# Altium PCB PCB1.PcbDoc
Units mil, origin at the board's own origin, x right, y up, seen from the top; angles counter-clockwise.
Board outline 8700 x 4700 mil, 2 copper layers (Top Layer, Bottom Layer); 42 components, 37 nets, 169 pads, 0 vias.
Unrouted connection lines stored in the file: 4.
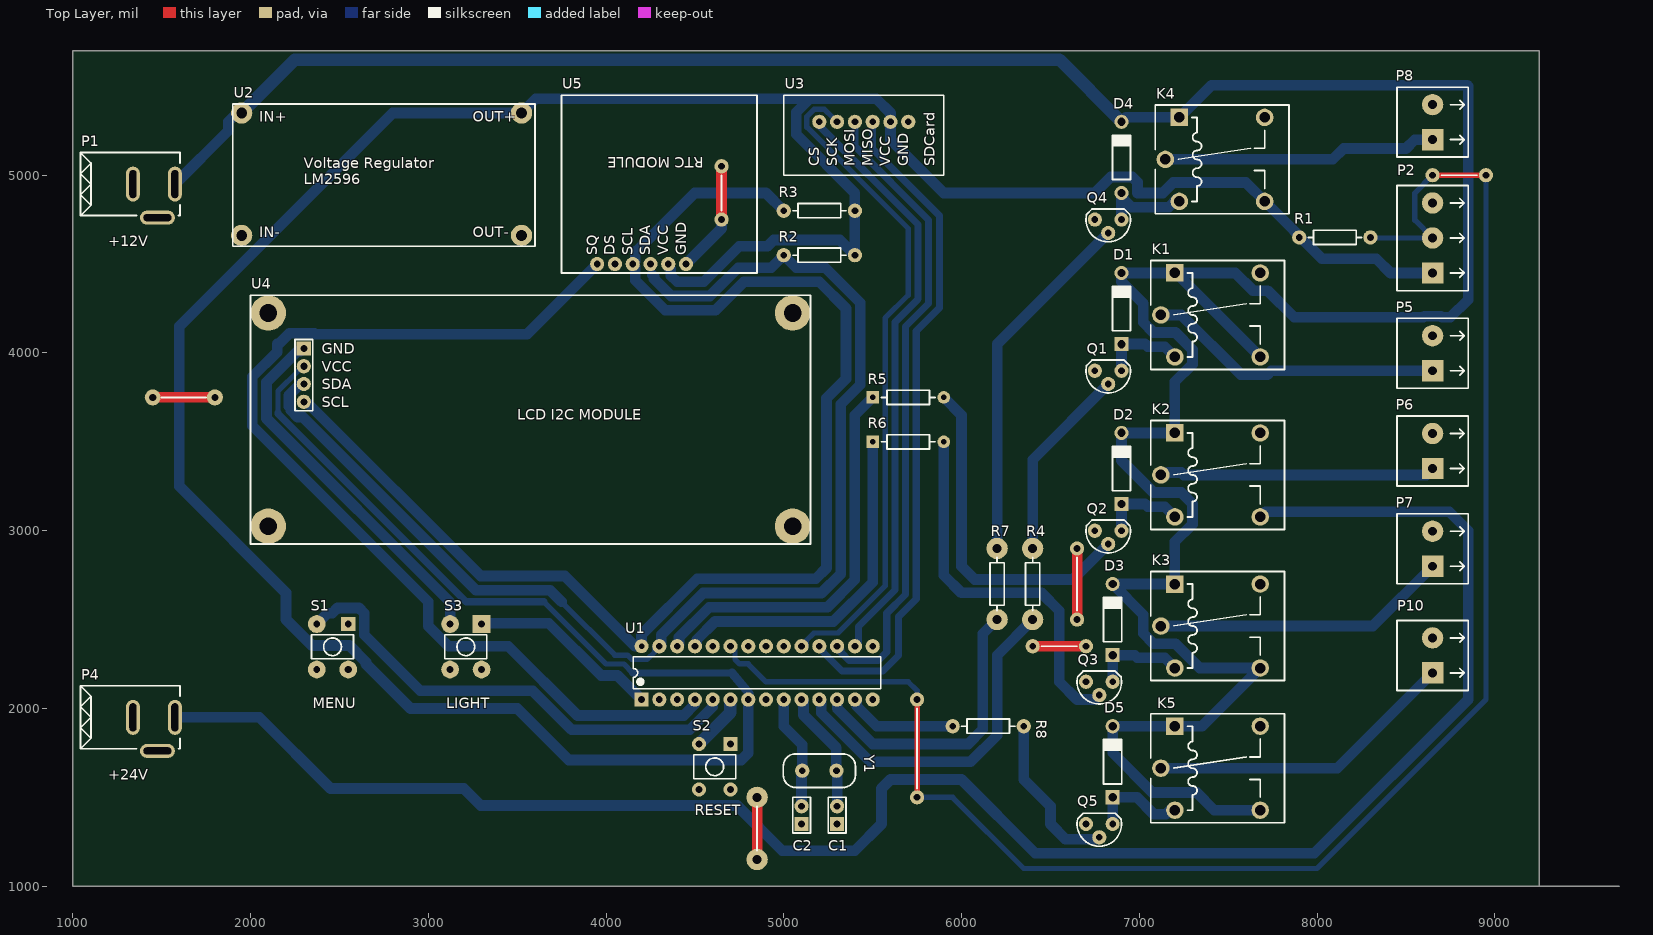
[diagram p0: Top Layer view]
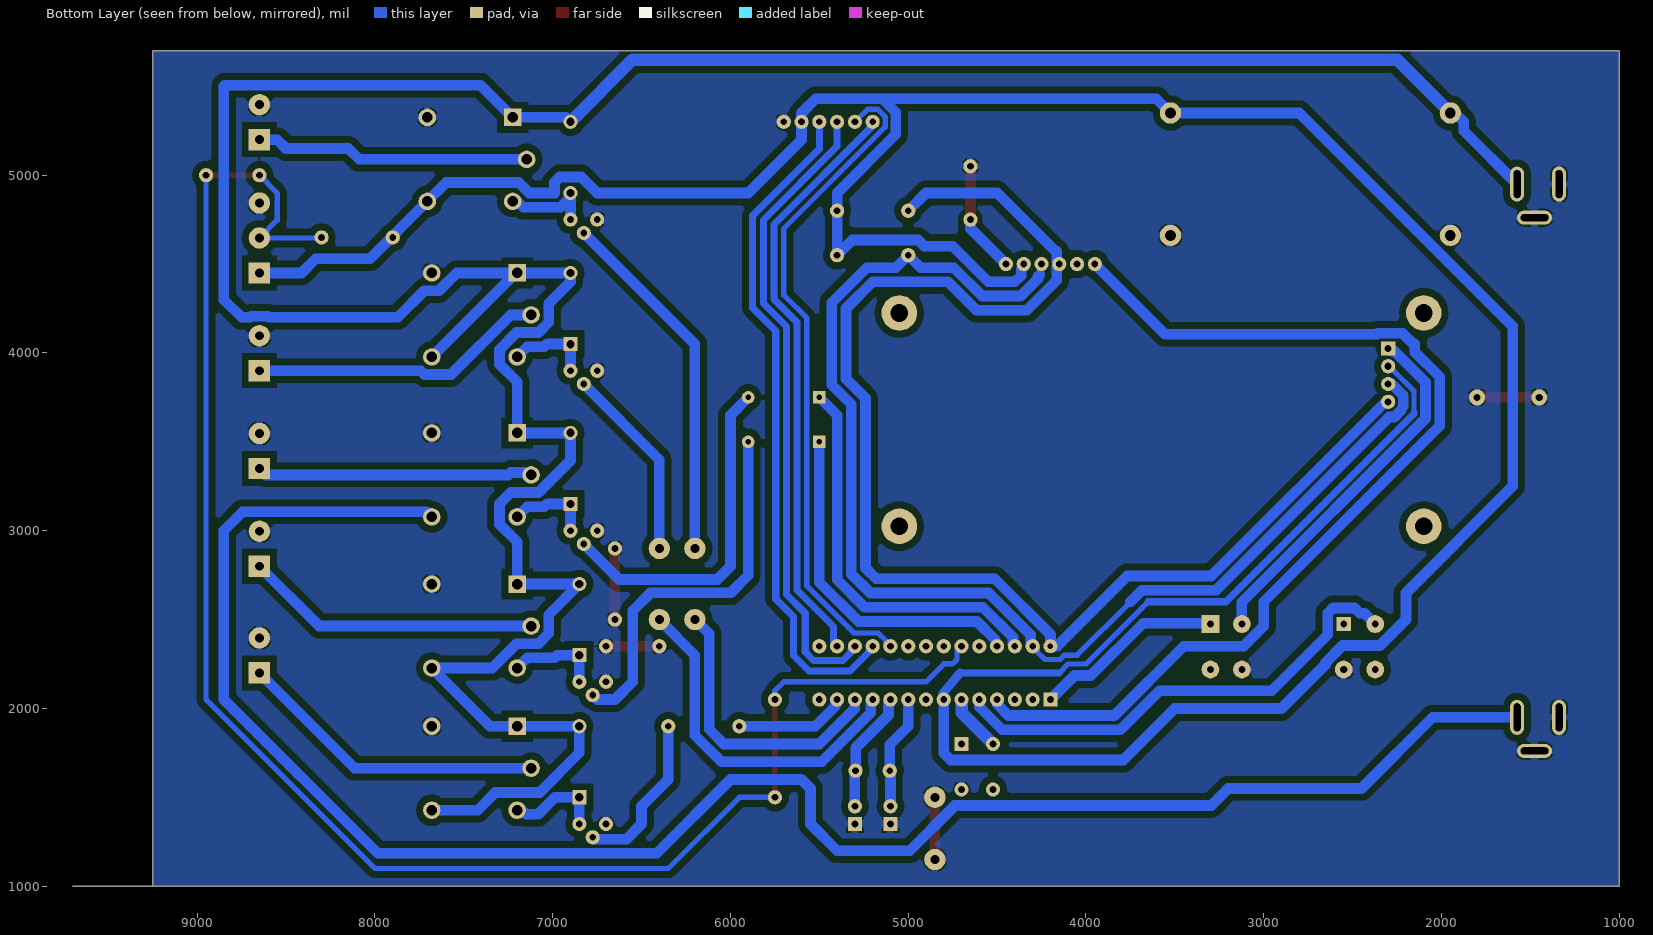
[diagram p1: Bottom Layer view, seen from below]
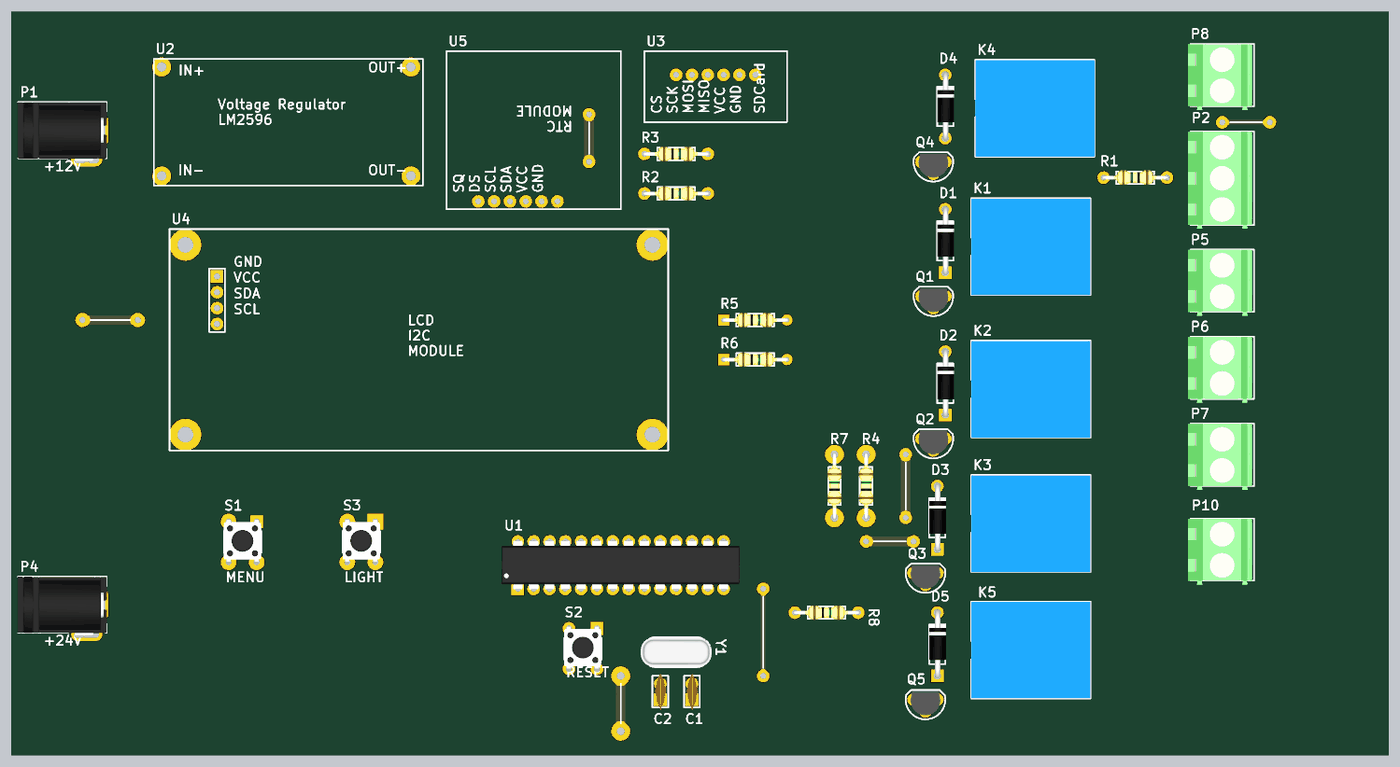
[diagram p2: 3D render of the assembled board from above, using the file's embedded part models]

## Layer stack, top to bottom
Top Solder: solder mask 0.4, Solder Resist, Dk 3.5
Top Layer: signal copper 1.4
Dielectric 1: dielectric 12.6, FR-4, Dk 4.8
Bottom Layer: signal copper 1.4
Bottom Solder: solder mask 0.4, Solder Resist, Dk 3.5

## Board outline
1000,1000 1000,5700 9250,5700 9250,1000 9700,1000

## Design rules (kind name [scope] priority, off if disabled: settings)
Clearance Pour [InPolygon] p1: gap=40
Clearance [All] p2: gap=15
PlaneConnect [All] p1: planeconnectstyle=Relief reliefexpansion=20 reliefentries=4 reliefconductorwidth=40 reliefairgap=10
PolygonConnect [All] p1: connectstyle=Relief reliefconductorwidth=40 reliefentries=4 polygonreliefangle="90 Angle" airgapwidth=10
RoutingVias [All] p1: holewidth=28 width=50 viastyle="Through Hole" minholewidth=28 minwidth=50 maxholewidth=28 maxwidth=50
SolderMaskExpansion [All] p1: expansion=4
Width [All] p1: maxlimit=200 minlimit=30 preferedwidth=60
29 further rules are at their usual default settings.

## Components (designator, comment, footprint, x,y, rotation, side; value= is the part's Value field where it differs from the comment)
C1 "22pF" C100-200-100 5300,1350 r90 top
C2 "22pF" C100-200-100 5100,1350 r90 top
D1 "1N4007" DO-41-Plastic#1 6900,4050 r90 top
D2 "1N4007" DO-41-Plastic#1 6900,3150 r90 top
D3 "1N4007" DO-41-Plastic#1 6850,2300 r90 top
D4 "1N4007" DO-41-Plastic#2 6900,4900 r90 top
D5 "1N4007" DO-41-Plastic#1 6850,1500 r90 top
K1 "AZ1RC1" Relay-A 7200,4450 r90 top
K2 "AZ1RC1" Relay-A 7200,3550 r90 top
K3 "AZ1RC1" Relay-A 7200,2700 r90 top
K4 "AZ1RC1" Relay-A 7225,5325 r90 top
K5 "AZ1RC1" Relay-A 7200,1900 r90 top
P1 "Alim" J4-DC-005 1575,4950 r90 top
P2 "Terminal" KRE_3 8650,4450 r90 top
P4 "Alim" J4-DC-005 1575,1950 r90 top
P5 "HEATER" KRE_2 8650,3900 r90 top
P6 "FOGGER" KRE_2 8650,3350 r90 top
P7 "FRESH AIR FAN" KRE_2 8650,2800 r90 top
P8 "LIGHT" KRE_2 8650,5200 r90 top
P10 "FOGGER FAN" KRE_2 8650,2200 r90 top
Q1 "BC548" TO-92/CBE 6900,3900 r180 top
Q2 "BC548" TO-92/CBE 6900,3000 r180 top
Q3 "BC548" TO-92/CBE 6850,2150 r180 top
Q4 "BC548" TO-92/CBE 6900,4750 r180 top
Q5 "BC548" TO-92/CBE 6850,1350 r180 top
R1 "4k7" R400-2.0mm#1 8300,4650 r180 top
R2 "4k7" R400-2.0mm#1 5000,4550 r0 top
R3 "4k7" R400-2.0mm#1 5000,4800 r0 top
R4 "16k" R400-2.0mm#2 6400,2500 r90 top
R5 "16k" R400-2.0mm#3 5500,3750 r0 top
R6 "16k" R400-2.0mm#3 5500,3500 r0 top
R7 "16k" R400-2.0mm#2 6200,2500 r90 top
R8 "16k" R400-2.0mm#1 5950,1900 r0 top
S1 "MENU" DTS-6.0mm-6.0mm-THT#1 2550,2475 r0 top
S2 "LIGHT" DTS-6.0mm-6.0mm-THT#2 4700,1800 r0 top
S3 "RESET" DTS-6.0mm-6.0mm-THT#3 3300,2475 r0 top
U1 "ATmega328PA-PU" DIP28-300(100) 4200,2050 r0 top
U2 "LM2596" LM2596 1950,5350 r0 top
U3 "SDCard" SDCard 5200,5300 r90 top
U4 "LCD I2C" LCD_I2C 3500,3675 r0 top
U5 "RTC" RTC 3950,4500 r90 top
Y1 "16Mhz" HC49-US-THT 5200,1650 r0 top

## Footprints (in the part's own frame and the unit in brackets; to place one, negate y for a bottom-side part, rotate by r counter-clockwise, add the part's x,y. Pads: shape width x height; smd on the part's side, far side on the other; paste and mask are expansions set on the pad)
C100-200-100 [mil] "Radial Cap, Thru-Hole; 2 Leads; 0.1 in Pin Spacing"
  rect 80x80 hole 38: 1(0,0)
  round 80 hole 38: 2(100,0)
  silkscreen extent -50,-50 150,50, body extent -65,-35 165,32, height 245
DIP28-300(100) [mil] "DIP, 28-Leads, Row Spacing 7.62mm, Pitch 2.54mm, Body 34.67x7.3mm"
  rect 80x80 hole 38: 1(0,0)
  round 80 hole 38: 2(100,0) 3(200,0) 4(300,0) 6(500,0) 7(600,0) 8(700,0) 9(800,0) 10(900,0) 11(1000,0) 12(1100,0) 13(1200,0) 14(1300,0) 15(1300,300) 16(1200,300) 17(1100,300) 18(1000,300) 19(900,300) 20(800,300) 21(700,300) 22(600,300) 23(500,300) 24(400,300) 25(300,300) 26(200,300) 27(100,300)
  round 80 hole 38 unplated: 5(400,0)
  round 78.74 hole 31.5: 28(0,300)
  silkscreen extent -47,60 1347,240, body extent -102,-4 1402,305, height 171
DO-41-Plastic#1 [mil] "Diode, Axial; Body 4.1 x 2.6 mm (LxDia. max), Lead Dia. 1.14 mm (max), Lead Spacing 10.16 mm; 3D Wagner Bernardo"
  rect 80x80 hole 47.24: A(0,0)
  round 80 hole 47.24: K(400,0)
  silkscreen extent 75,-52 325,51, body extent -15,-55 419,51, height 112
DO-41-Plastic#2 [mil] "Diode, Axial; Body 4.1 x 2.6 mm (LxDia. max), Lead Dia. 1.14 mm (max), Lead Spacing 10.16 mm; 3D Wagner Bernardo"
  round 80 hole 47.24: A(0,0) K(400,0)
  silkscreen extent 75,-52 325,51, body extent -15,-55 419,51, height 112
DTS-6.0mm-6.0mm-THT#1 [mil] "Push Button Switch Through Role 6.0mm x 6.0mm"
  rect 80x80 hole 38: 1(0,0)
  round 100 hole 40: 2(0,-255.91)
  round 100 hole 38: 3(-177.17,0) 4(-177.17,-255.91)
  silkscreen extent -207,-196 30,-60, body extent -207,-275 29,32, height 197
DTS-6.0mm-6.0mm-THT#2 [mil] "Push Button Switch Through Role 6.0mm x 6.0mm"
  rect 80x80 hole 38: 1(0,0)
  round 80 hole 38: 2(0,-255.91) 3(-177.17,0) 4(-177.17,-255.91)
  silkscreen extent -207,-196 30,-60, body extent -207,-275 29,32, height 197
DTS-6.0mm-6.0mm-THT#3 [mil] "Push Button Switch Through Role 6.0mm x 6.0mm"
  rect 100x100 hole 38: 1(0,0)
  round 100 hole 38: 2(0,-255.91) 3(-177.17,0) 4(-177.17,-255.91)
  silkscreen extent -207,-196 30,-60, body extent -207,-275 29,32, height 197
HC49-US-THT [mil] "THT Quartz Crystal"
  round 80 hole 38: 1(-96.06,0) 2(96.06,0)
  silkscreen extent -203,-94 203,94, body extent -223,-91 224,92, height 138
J4-DC-005 [mm] "Jack J4 DC-005, 9 mm Width, 14.2 mm Long, 11 mm Height, 3D Teodor Luchian"
  oval 5x2 hole 1 slot 4 at 0 deg: 1(0,0) 2(0,6)
  oval 2x5 hole 1 slot 4 at 90 deg: 3(-4.8,2.5)
  silkscreen extent -4.5,-0.7 4.5,13.5, body extent -5.03,-0.76 4.47,13.64, height 11
KRE_2 [mil] "Terminal Block 2 pins"
  rect 120x120 hole 50: 1(0,0)
  round 120 hole 50: 2(196.85,0)
  silkscreen extent -98,-200 295,200, body extent -123,-190 294,216, height 559
KRE_3 [mil] "Terminal Block 3 pins"
  rect 120x120 hole 50: 1(0,0)
  round 120 hole 50: 2(196.85,0) 3(393.7,0)
  silkscreen extent -100,-200 492,200, body extent -123,-190 491,216, height 559
LCD_I2C [mil]
  rect 80x80 hole 40: 1(-1200,350)
  round 80 hole 40: 2(-1200,250) 3(-1200,150) 4(-1200,50)
  round 200 hole 100: 5(-1400,550) 6(-1400,-650) 7(1550,550) 8(1550,-650)
  silkscreen extent -1500,-750 1650,650
LM2596 [mil] "LM2596 module"
  round 120 hole 60: 1(0,0) 2(0,-688.98) 3(1574.8,0) 4(1574.8,-688.98)
  silkscreen extent -50,-750 1650,50
R400-2.0mm#1 [mil] "Axial Device, Thru-Hole; 2 Leads; 0.4 in Pin Spacing"
  round 80 hole 38: 1(0,0) 2(400,0)
  silkscreen extent 50,-40 350,40, body extent -12,-46 412,45, height 116
R400-2.0mm#2 [mil] "Axial Device, Thru-Hole; 2 Leads; 0.4 in Pin Spacing"
  round 120 hole 50: 1(0,0) 2(400,0)
  silkscreen extent 50,-40 350,40, body extent -12,-46 412,45, height 116
R400-2.0mm#3 [mil] "Axial Device, Thru-Hole; 2 Leads; 0.4 in Pin Spacing"
  rect 70.87x70.87 hole 31.5: 1(0,0)
  round 70.87 hole 31.5: 2(400,0)
  silkscreen extent 50,-40 350,40, body extent -12,-46 412,45, height 116
Relay-A [mm] "Metaltex Relay Type A; 3D: Jean-François Garneau"
  rect 2.5x2.5 hole 1.5: 1(0,0)
  round 2.5 hole 1.5: 2(-12,0) 3(-6,2) 4(0,-12.2) 5(-12,-12.2)
  silkscreen extent -13.78,-15.67 1.78,3.43, body extent -13.78,-15.67 1.72,3.43, height 15.3
RTC [mil]
  round 80 hole 38: 1(0,0) 2(0,-100) 3(0,-200) 4(0,-300) 5(0,-400) 6(0,-500)
  silkscreen extent -50,-900 950,200
SDCard [mil] "SDCard Module"
  round 80 hole 38: 1(0,0) 2(0,-100) 3(0,-200) 4(0,-300) 5(0,-400) 6(0,-500)
  silkscreen extent -300,-700 150,200
TO-92/CBE [mil] "Transistor Outline Package, Case Style 92 CBE; 3D Sergey Atanov"
  round 80 hole 38: B(75,75) C(0,0) E(150,0)
  silkscreen extent -50,-60 200,125, body extent -37,-50 187,100, height 239

## Part data
C1 C2: library part Capacitor, "Capacitor"
D1 D2 D3 D4 D5: "General Purpose Rectifier"
K1 K2 K3 K4 K5: "Miniature Relay, 10 A, 6 Vdc, 250 Vac"
P1 P4: library part Jack_J4, "Jack J4"
P2: library part KRE_3, "Terminal Block 1x3"
P5 P6 P7 P8 P10: library part KRE_2, "Terminal Block 1x2"
Q1 Q2 Q3 Q4 Q5: "NPN Epitaxial Silicon Transistor"
R1 R2 R3 R4 R5 R6 R7 R8: library part Resistor, "Resistor"
S1 S2 S3: library part PushButton_4, "Tactile Switch SPST 4 pins"
U1: "8-bit AVR Microcontroller with 32 KB In-System Programmable Flash"
U4: library part LCD_I2C
Y1: library part Crystal, "Crystal"

## Free pads (board coordinates)
  round 80 hole 38: 1(6400,2350) 3(4650,5050) 4(4650,4750) 5(6700,2350) 6(6650,2500) 7(6650,2900) 12(5750,2050) 13(5750,1500) 14(8650,5000) 15(8950,5000)
  round 90 hole 40: 10(1800,3750) 11(1450,3750)
  round 120 hole 50: 16(4850,1500) 17(4850,1150)

## Nets (pads, with @x,y where several pads share a name; then routed paths per layer and width w, separated by ;. In a path a pad name is that pad's centre, name@x,y a point inside that pad or via, vN(x,y) a via of type N, cw(c..) or ccw(c..) an arc to the next point about the centre after c; other vN are vias at no path point)
+5: K4.5 P2.1 R1.2 R2.2 R3.2 U1.7 U2.3 U3.5 U4.2 U5.5 | length 19314.5
  Bottom Layer w30: 2155,3664.94 2155,3786.07 U4.2@2268.93,3900 ; 3650,2600 4000,2250 4100,2250 4150,2200
  Bottom Layer w40: 2155,3664.94 2155,3657.87 3212.87,2600 3650,2600 ; 4150,2200 4708.54,2200
  Bottom Layer w50: 4708.54,2200 4803.33,2085.68 U1.7
  Bottom Layer w60: U5.5 4350,4485.86 4364.9,4470.96 4364.9,4435.1 4400,4400 4550,4400 4750,4600 4908.42,4600 4943.86,4635.43 5314.57,4635.43 R2.2 R3.2 5400,4900 5070,5230 5070,5353.85 5146.15,5430 ; U1.7 4800,1749.29 4760.71,1710 3790,1710 3500,2000 2900,2000 2650,2250 2650,2260.52 2556.68,2353.84 2346.16,2353.84 2200,2500 2200,2650 1600,3250 1600,4150 2800,5350 U2.3 3604.8,5430 5146.15,5430 ; P2.1 8413.14,4450 8333.14,4530 8027.88,4530 K4.5 7599.3,4958.57 7190.7,4958.57 7132.13,4900 6990,4900 6990,4960.71 6960.71,4990 6839.29,4990 6749.29,4900 5900,4900 5600,5200 U3.5 5600,5350 5520,5430 5146.15,5430
+12: D1.K D2.K D3.K D4.K D5.K K1.1 K1.5 K2.1 K3.1 K3.5 K4.1 K5.1 K5.5 P1.1 U2.1 | length 17951.7
  Bottom Layer w60: P1.1 1875,5250 1875,5300 U2.1@1950,5375 ; D4.K 6925,5325 K4.1 7406.85,5506.85 8843.15,5506.85 8850,5500 8850,4300 8750,4200 8702.41,4200 8695.56,4206.85 8604.44,4206.85 8597.59,4200 7872.2,4200 7721.41,4350.79 7639.22,4350.79 7540.01,4450 K1.1@7207.88,4450 ; K5.5 7422.44,1427.56 7323.23,1526.77 7073.23,1526.77 6850,1750 D5.K K5.1 7352.76,1900 K3.5 7340.31,2227.56 7203.3,2364.57 7080.16,2364.57 7022.05,2422.68 7022.05,2527.95 D3.K K3.1 7200,2937.25 7299.21,3036.46 7299.21,3149.21 7300,3150 7235.43,3214.57 7080.16,3214.57 6900,3394.73 D2.K K2.1 7200,3837.25 7299.21,3936.46 7299.21,3999.21 7300,4000 7299.21,4000.79 7299.21,4018.66 7203.3,4114.57 7080.16,4114.57 7022.05,4172.68 7022.05,4277.95 6900,4400 D1.K K1.1 K1.1@7207.88,4450 ; K1.5 K1.1@7207.88,4450
  Bottom Layer w70: U2.1 2250,5650 6550,5650 D4.K
+24: K2.5 P4.1 | length 10574.8
  Bottom Layer w60: P4.1 2050,1950 2450,1550 3200,1550 3295.91,1454.09 4737.28,1454.09 4991.37,1200 5400,1200 5550,1350 5550,1550 5600,1600 6000,1600 6415,1185 7985,1185 8850,2050 8850,3000 8743.15,3106.85 7709.61,3106.85 K2.5
FOGGER: R5.1 U1.26 | length 2251.9
  Bottom Layer w60: U1.26 4400,2359.37 4410.63,2359.37 4410.63,2400.16 4579.84,2569.37 5245.64,2569.37 5400,2723.73 5400,3650 R5.1
"FOGGER FAN": R8.1 U1.13 | length 627.6
  Bottom Layer w60: U1.13 5410.63,2039.37 5410.63,2012.98 5523.61,1900 R8.1
"FRESH AIR FAN": R6.1 U1.25 | length 1954.2
  Bottom Layer w60: U1.25 4510.63,2360.63 4510.63,2387.02 4612.98,2489.37 5278.78,2489.37 5500,2710.59 R6.1
GND: C1.1 C2.1 K1.4 K2.4 K3.4 K4.4 K5.4 P1.2 P1.3 P2.3 P4.2 P4.3 P5.2 P6.2 P7.2 P8.2 P10.2 pad.1 pad.3 pad.4 pad.5 pad.6 pad.7 pad.10 pad.11 pad.16 pad.17 Q1.E Q2.E Q3.E Q4.E Q5.E S1.2 S2.2 S3.3 S3.4 U2.2 U2.4 U3.6 U4.1 U5.6 | length 4113
  Top Layer w60: pad.11 pad.10 ; pad.4 pad.3 ; pad.17 pad.16 ; pad.1 pad.5 ; pad.6 pad.7
  Bottom Layer w60: U4.1 2290,4025 2290,4018.93 2281.07,4010 2264.79,4010 2090,3835.21 2090,3630.94 3122.83,2598.11 S3.3 ; U5.6 4650,4700 pad.4
HEATER: R4.1 U1.11 | length 1983.2
  Bottom Layer w60: U1.11 5200,2040.63 5210.63,2040.63 5210.63,1976.23 5486.86,1700 6050,1700 6200,1850 6200,2300 R4.1
LIGHT: R7.1 U1.12 | length 1637.3
  Bottom Layer w60: U1.12 5300,2000 5500,1800 6036.86,1800 6120,1883.14 6120,2420 R7.1
NetC1_2: C1.2 U1.10 Y1.2 | length 682.8
  Bottom Layer w60: U1.10 5110.63,2039.37 5110.63,1963.1 5296.06,1777.66 Y1.2 5300,1646.06 C1.2
NetC2_2: C2.2 U1.9 Y1.1 | length 644.7
  Bottom Layer w60: U1.9 5000,1900 5103.94,1796.06 Y1.1 5100,1646.06 C2.2
NetD1_A: D1.A K1.2 Q1.C | length 480
  Bottom Layer w60: Q1.C D1.A 7031.6,4050 7047.03,4034.57 7142.99,4034.57 K1.2
NetD2_A: D2.A K2.2 Q2.C | length 480
  Bottom Layer w60: Q2.C D2.A 7031.6,3150 7047.03,3134.57 7142.99,3134.57 K2.2
NetD3_A: D3.A K3.2 Q3.C | length 530
  Bottom Layer w60: Q3.C D3.A 6973.48,2300 6988.91,2284.57 7142.99,2284.57 K3.2
NetD4_A: D4.A K4.2 Q4.C | length 552.3
  Bottom Layer w60: Q4.C D4.A 6910,4900 6910,4866.86 6956.86,4820 7165.27,4820 7211.41,4866.15 K4.2
NetD5_A: D5.A K5.2 Q5.C | length 560.8
  Bottom Layer w60: Q5.C D5.A 6986.86,1500 7082.93,1403.93 7149.2,1403.93 7186.41,1441.15 K5.2
NetK1_3: K1.3 P5.1 | length 1676.6
  Bottom Layer w60: K1.3 7236.22,4213.78 7571.65,3878.35 7721.41,3878.35 7743.06,3900 P5.1
NetK2_3: K2.3 P6.1 | length 1555
  Bottom Layer w60: K2.3 7148.43,3313.78 7162.02,3327.37 7235.77,3327.37 7249.36,3313.78 8613.78,3313.78 P6.1
NetK3_3: K3.3 P7.1 | length 1668
  Bottom Layer w60: K3.3 8313.78,2463.78 P7.1
NetK4_3: K4.3 P8.1 | length 1549.8
  Bottom Layer w60: K4.3 8088.78,5088.78 8150,5150 8500,5150 8550,5200 P8.1
NetK5_3: K5.3 P10.1 | length 1750.8
  Bottom Layer w60: K5.3 8113.78,1663.78 P10.1
NetP2_2: P2.2 pad.12 pad.13 pad.14 pad.15 R1.1 U1.23 | length 9578.6
  Top Layer w30: pad.13 pad.12 ; pad.14 pad.15
  Bottom Layer w30: U1.23 4725.63,2324.37 4725.63,2275.63 4750.63,2250.63 4799.37,2250.63 4900,2150 5700,2150 5750,2100 pad.12 ; pad.13 5950,1500 6350,1100 8000,1100 8950,2050 pad.15 ; R1.1 8303.15,4646.85 P2.2 8550,4746.85 8550,4900 pad.14
NetQ1_B: Q1.B R4.2 | length 1101
  Bottom Layer w60: R4.2 6400,3400 Q1.B
NetQ2_B: Q2.B R5.2 | length 1930.3
  Bottom Layer w60: R5.2 6000,3650 6000,2800 6075,2725 6625,2725 Q2.B
NetQ3_B: Q3.B R6.2 | length 2159.6
  Bottom Layer w60: R6.2 5900,2750 6000,2650 6450,2650 6550,2550 6550,2150 6650,2050 6750,2050 Q3.B
NetQ4_B: Q4.B R7.2 | length 2033.9
  Bottom Layer w60: R7.2 6200,4050 Q4.B
NetQ5_B: Q5.B R8.2 | length 926.5
  Bottom Layer w60: R8.2 6350,1600 6500,1450 6500,1350 6585,1265 6765,1265 Q5.B
NetR2_1: R2.1 U1.27 U4.3 U5.4 | length 7104.6
  Bottom Layer w30: 3750,2600 4050,2300 4120.71,2300 4145.08,2275.63 4230.81,2275.63 4274.37,2319.19 4274.37,2350 U1.27
  Bottom Layer w60: 2215,3700 2215,3760.21 2279.79,3825 U4.3 ; 2227.4,3677.4 2264.79,3640 2293.85,3640 3268.85,2665 3685,2665 3750,2600 ; 4260.1,4439.9 4270,4430 4270,4416.86 4366.86,4320 4583.14,4320 4743.14,4480 4930,4480 R2.1 5070,4480 5233.14,4480 5430,4283.14 5430,3821.58 5320,3711.58 5320,2756.86 5212.51,2649.37 4546.71,2649.37 4310.63,2413.29 4310.63,2350 U1.27
NetR3_1: R3.1 U1.28 U4.4 U5.3 | length 7806.1
  Bottom Layer w60: U4.4 2310,3715 2324.91,3715 3294.91,2745 3767.63,2745 4162.63,2350 U1.28 4200,2415.8 4513.57,2729.37 5179.37,2729.37 5240,2790 5240,3744.71 5350,3854.71 5350,4250 5200,4400 4776.27,4400 4616.27,4240 4333.73,4240 4165,4408.73 4165,4485 U5.3 4165,4515 4165,4570.21 4170.21,4570.21 4500,4900 4900,4900 R3.1
NetS1_3: S1.3 U1.5 | length 2696.8
  Bottom Layer w60: S1.3 S1.3@2375,2475 ; S1.3@2385.33,2487.5 2433.54,2535.71 2460,2535.71 2489.29,2565 2610.71,2565 2640,2535.71 2640,2414.29 2954.29,2100 3586.86,2100 3806.23,1880.63 4470.16,1880.63 4600,2010.47 U1.5
NetS2_3: S2.3 U1.6 | length 323.4
  Bottom Layer w70: S2.3 4700,1977.17 U1.6
NetS3_1: S3.1 U1.1 | length 1080.2
  Bottom Layer w60: S3.1 3305,2480 3678.08,2480 3973.08,2185 4065,2185 U1.1
NetU1_16: U1.16 U3.1 | length 3326.9
  Bottom Layer w40: U3.1 5200,5277.78 5755,4722.78 5755,4302.49 5625.43,4172.92 5625.43,2666.32 5420.63,2461.51 5420.63,2370.63 U1.16
NetU1_17: U1.17 U3.3 | length 3591.8
  Bottom Layer w40: U1.17 5319.37,2330.63 5320.63,2330.63 5320.63,2317.12 5367.12,2270.63 5532.88,2270.63 5579.37,2317.12 5579.37,2535.4 5685.43,2641.46 5685.43,4148.07 5815,4277.63 5815,4747.63 5400,5162.63 U3.3
NetU1_18: U1.18 U3.4 | length 3769.6
  Bottom Layer w40: U1.18@5220.63,2329.37 5220.63,2317.12 5327.12,2210.63 5557.73,2210.63 5645,2297.9 5645,2516.18 5745.43,2616.61 5745.43,4123.21 5875,4252.78 5875,4772.49 5500,5147.49 U3.4
NetU1_19: U1.19 U3.2 | length 3774.6
  Bottom Layer w30: U1.19 5125.63,2350 5125.63,2380.81 5169.19,2424.37 5305.7,2424.37 5570.43,2689.1 5570.43,4195.7 5700,4325.27 5700,4700 5130,5270 5130,5328.99 5171.01,5370 5228.99,5370 5248.99,5350 5250,5350 U3.2
SOUT: U1.4 U5.1 | length 5805.9
  Bottom Layer w60: U5.1 3555,4105 2363.64,4105 2358.64,4110 2218.93,4110 2158.93,4050 2150,4050 2150,4005.71 2010,3865.71 2010,3590 3000,2600 3000,2463.48 3113.48,2350 3450,2350 3839.37,1960.63 4437.02,1960.63 4500,2023.61 U1.4
pads on no net: S1.1 S1.4 S2.1 S2.4 S3.2 U1.2 U1.3 U1.8 U1.14 U1.15 U1.20 U1.21 U1.22 U1.24 U4.5 U4.6 U4.7 U4.8 U5.2

## Polygon pours and split planes (outlines as drawn)
GND on Bottom Layer "GND_L02_P001" (solid, pour order 1): 1000,5700 1000,1000 9250,1000 9250,5700

## Silkscreen, mask and mechanical layers (free items; w line width, h text height)
Top Overlay:
  lines w10: 1500,3750 1750,3750 ; 4650,4800 4650,5000 ; 4850,1200 4850,1450 ; 5750,1550 5750,2000 ; 6450,2350 6650,2350 ; 6650,2550 6650,2850 ; 8700,5000 8900,5000
  text "+12V" at 1200,4600 h60
  text "MENU" at 2350,2000 h60
  text "LIGHT" at 3100,2000 h60
  text "+24V" at 1200,1600 h60
  text "RESET" at 4500,1400 h60

## Text inside footprints (layer, text, board x,y; h text height)
U2: Top Overlay "IN-" at 2050,4650 h60; Top Overlay "Voltage Regulator / LM2596" at 2300,4950 h60; Top Overlay "OUT-" at 3250,4650 h60; Top Overlay "OUT+" at 3250,5300 h60; Top Overlay "IN+" at 2050,5300 h60
U3: Top Overlay "CS" at 5200,5050 h60 r90; Top Overlay "SCK" at 5300,5050 h60 r90; Top Overlay "MOSI" at 5400,5050 h60 r90; Top Overlay "MISO" at 5500,5050 h60 r90; Top Overlay "VCC" at 5600,5050 h60 r90; Top Overlay "GND" at 5700,5050 h60 r90
U4: Top Overlay "GND" at 2400,3995 h60; Top Overlay "VCC" at 2400,3895 h60; Top Overlay "SDA" at 2400,3795 h60; Top Overlay "SCL" at 2400,3695 h60; Top Overlay "LCD I2C MODULE" at 3500,3625 h60
U5: Top Overlay "RTC MODULE" at 4550,5100 h60 r180; Top Overlay "SQ" at 3950,4550 h60 r90; Top Overlay "DS" at 4050,4550 h60 r90; Top Overlay "SCL" at 4150,4550 h60 r90; Top Overlay "SDA" at 4250,4550 h60 r90; Top Overlay "VCC" at 4350,4550 h60 r90; Top Overlay "GND" at 4450,4550 h60 r90